# EAGLE board PCB2D-SmartWatch (EAGLE 9.7.0)
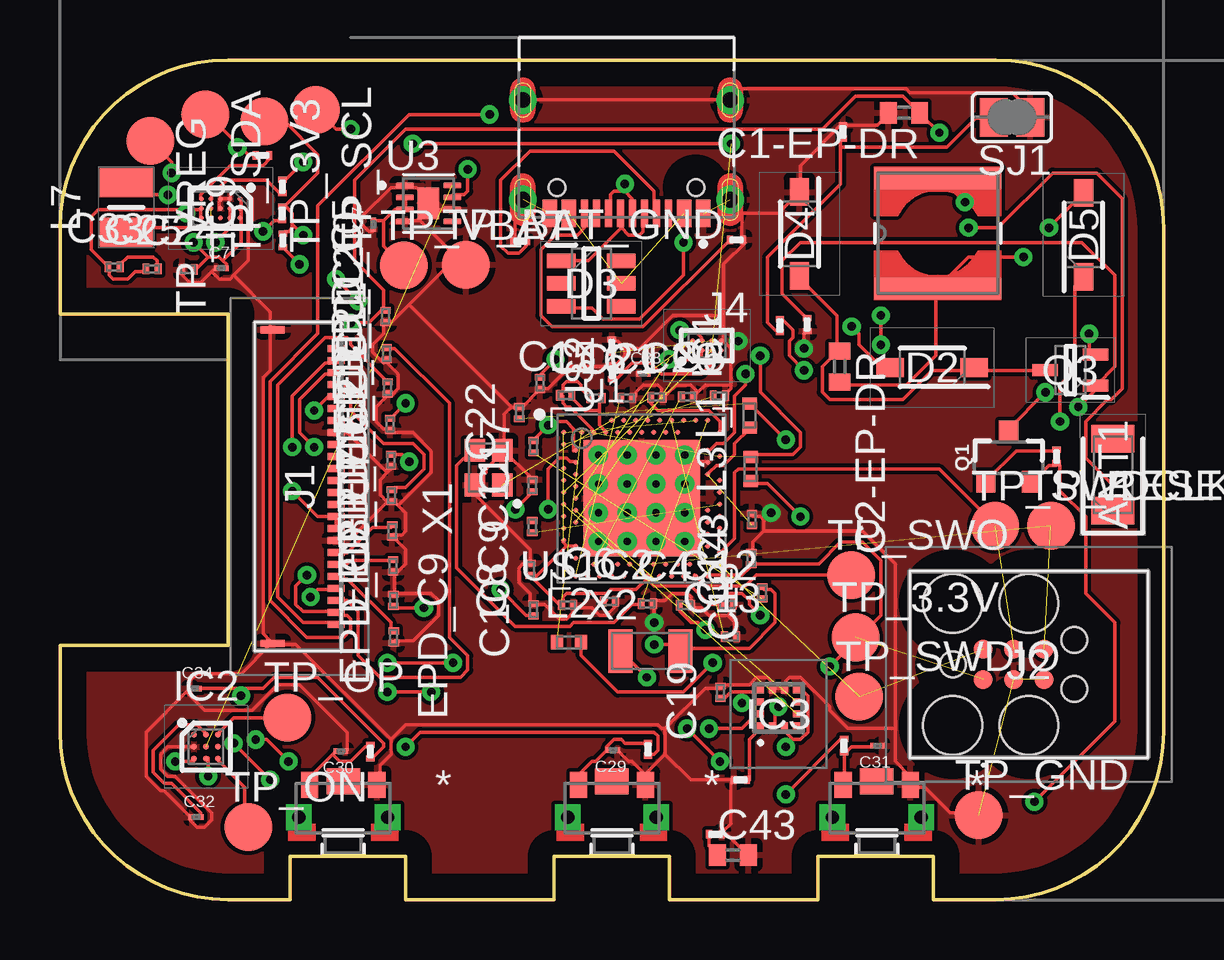
[diagram p0: board, top side]
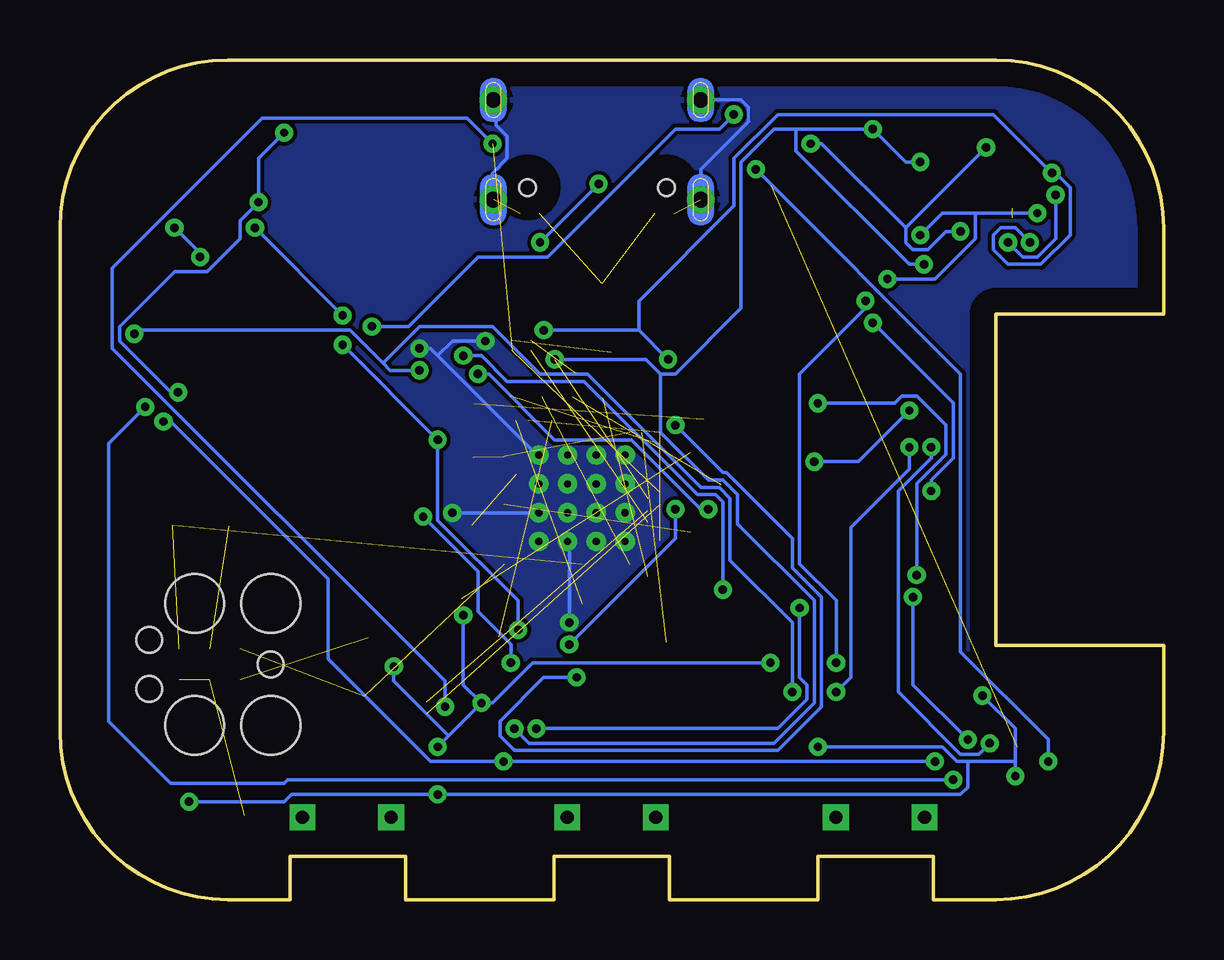
[diagram p1: board, bottom side, seen from below]

Size 46 x 35 mm. Coordinates in mm from the lower left corner, seen from the top.
Outline: 39,0 36.4,0 36.4,1.8 31.6,1.8 31.6,0 25.4,0 25.4,1.8 20.6,1.8 20.6,0 14.4,0 14.4,1.8 9.6,1.8 9.6,0 7,0 arc-90 0,7 0,10.6 7,10.6 7,24.4 0,24.4 0,28 arc-90 7,35 39,35 arc-90 46,28 46,7 arc-90 39,0
Copper layers (1*16): Top 0.035mm / dielectric 1.5mm / Bottom 0.035mm
Design rules "Fusion Electronics Design Rules": minimum track width 6mil, minimum drill 0.35mm, track to track 6mil, track to pad 6mil, pad to pad 6mil, via to via 6mil, smd to smd 6mil, copper to edge 40mil, drill to drill 6mil, minimum pad ring 10mil, minimum via ring 8mil, stop-mask expansion 4mil, vias tented up to drill 9999mil, thermal gap 10mil

## Footprints (pad centres in the part's own frame; a part is rotated, then mirrored left to right if it is on the bottom)
2450AT18B100E_ANTC3216X140N = smd 1.15 x 1.8: 1 -1.5,0; 2 1.5,0
NORDIC_NRF_3_RESC0201_L = smd 0.28 x 0.43: 1 -0.255,0; 2 0.255,0
ESP32_C6_LIBRARY_1_ESP32_WROVER_EAGLE-LTSPICE_C0402 = smd 0.7 x 0.9: 1 -0.65,0; 2 0.65,0
GRM011R60J152KE01L_2_CAPC0201X13N = smd 0.22 x 0.23: 1 -0.185,0; 2 0.185,0
GRM011R60J152KE01L_1_0201 = smd 0.35 x 0.25: 1 0,0.275; 2 0,-0.275
ESP32_C6_LIBRARY_5_SOD3716X135N = smd 1.15 x 0.8: 1 -1.75,0; 2 1.75,0
ESP32_C6_LIBRARY_3_SOT95P280X145-6N = smd 1.2 x 0.6: 1 -1.25,0.95; 2 -1.25,0; 3 -1.25,-0.95; 4 1.25,-0.95; 5 1.25,0; 6 1.25,0.95
BQ25180YBGR_BGA8C40P2X4_100X155X50 = smd 0.2 x 0.2: A1 -0.2,0.6; A2 0.2,0.6; B1 -0.2,0.2; B2 0.2,0.2; C1 -0.2,-0.2; C2 0.2,-0.2; D1 -0.2,-0.6; D2 0.2,-0.6
DRV2605YZFR_BGA9C50P3X3_144X144X62 = smd 0.25 x 0.25: A1 -0.5,0.5; A2 0,0.5; A3 0.5,0.5; B1 -0.5,0; B2 0,0; B3 0.5,0; C1 -0.5,-0.5; C2 0,-0.5; C3 0.5,-0.5
BMA423_BMA423 = smd 0.3 x 0.35: 1 -0.75,-0.775; 2 -0.25,-0.775; 3 0.25,-0.775; 4 0.75,-0.775; 7 0.75,0.775; 8 0.25,0.775; 9 -0.25,0.775; 10 -0.75,0.775 | smd 0.35 x 0.3: 5 0.775,-0.25; 6 0.775,0.25; 11 -0.775,0.25; 12 -0.775,-0.25
RT6160AWSC_BGA15C40P3X5_140X230X60 = smd 0.216 x 0.216: A1 -0.4,0.8; A2 0,0.8; A3 0.4,0.8; B1 -0.4,0.4; B2 0,0.4; B3 0.4,0.4; C1 -0.4,0; C2 0,0; C3 0.4,0; D1 -0.4,-0.4; D2 0,-0.4; D3 0.4,-0.4; E1 -0.4,-0.8; E2 0,-0.8; E3 0.4,-0.8
503480-2400_5034802400 = smd 0.3 x 0.7: 1 -5.75,1.525; 2 -5.25,1.525; 3 -4.75,1.525; 4 -4.25,1.525; 5 -3.75,1.525; 6 -3.25,1.525; 7 -2.75,1.525; 8 -2.25,1.525; 9 -1.75,1.525; 10 -1.25,1.525; 11 -0.75,1.525; 12 -0.25,1.525; 13 0.25,1.525; 14 0.75,1.525; 15 1.25,1.525; 16 1.75,1.525; 17 2.25,1.525; 18 2.75,1.525; 19 3.25,1.525; 20 3.75,1.525; 21 4.25,1.525; 22 4.75,1.525; 23 5.25,1.525; 24 5.75,1.525 | smd 0.3 x 1: MP1 -6.54,-1.125; MP2 6.54,-1.125
TC2030-IDC_TC2030IDC = smd 0.783 x 0.783: 1 -0.953,-0.635; 2 -0.953,0.635; 3 0.317,-0.635; 4 0.317,0.635; 5 1.588,-0.635; 6 1.588,0.635 | hole 2.451: -2.223,-2.54; -2.223,2.54; 0.952,-2.54; 0.952,2.54 | hole 1.067: -2.223,0; 2.857,-1.016; 2.857,1.016
KH-TYPE-C-16P_KINGHELM_KH-TYPE-C-16P = smd 0.6 x 1.15: A1_B12 -3.2,4.725; A4_B9 -2.4,4.725; A9_B4 2.4,4.725; A12_B1 3.2,4.725 | smd 0.3 x 1.15: A5 -1.25,4.725; A6 -0.25,4.725; A7 0.25,4.725; A8 1.25,4.725; B5 1.75,4.725; B6 0.75,4.725; B7 -0.75,4.725; B8 -1.75,4.725 | drill 0.65 pad 1.05: SH1 -4.32,0; SH2 4.32,0; SH3 -4.32,4.15; SH4 4.32,4.15 | hole 0.7: -2.89,3.65; 2.89,3.65
NORDIC_NRF_2_RESC0402_L = smd 0.5 x 0.6: 1 -0.5,0; 2 0.5,0
ESP32_C6_LIBRARY_2_IND_4828-WE-TPC_WRE = smd 0.9 x 5.3: 1 -2.286,0; 2 2.286,0
MLP2016SR47MT0S1_INDC2016X100N = smd 1.2 x 2.2: 1 -1.028,0; 2 1.028,0
ESP32_C6_LIBRARY_4_ESP32_C6_LIBRARY_4_ESP32_C6_LIBRARY_4_ESP32_C6_LIBRARY_4_ESP32_WROVER_SPARKFUN-DISCRETESEMI_SOT23-3 = smd 0.8 x 0.9: 1 -0.95,-1; 2 0.95,-1; 3 0,1.1
ESP32_C6_LIBRARY_6_SOT65P210X110-3N = smd 1.05 x 0.5: 1 -1.05,0.65; 2 -1.05,-0.65; 3 1.05,0
ERA-1AEB3401C_0201 = smd 0.35 x 0.25: 1 0,0.275; 2 0,-0.275
CPF0201D7K68C1_0201 = smd 0.35 x 0.25: 1 0,0.275; 2 0,-0.275
ESP32_C6_LIBRARY_7_JUMPER_SJ = smd 1.168 x 1.6: 1 -0.762,0; 2 0.762,0
2025-10-22_07-23-44_LIBRARY_SW_EVP-AKE31A_PAN = smd 0.711 x 1.092: 1 -1.4,-0.972; 2 1.4,-0.972 | drill 0.559 pad 0.914 square: 3 -1.848,0.381; 4 1.848,0.381 | smd 1.397 x 1.092: 5 0,-1.124
HECTOR_WATCH_1_TP20R = smd 2 x 2: TP 0,0
NORDIC_NRF_4_AQFN50P700X700X85_HS-74N = smd 4.85 x 4.85: P$74 0,0 | drill 0.3 pad 0.6: P$75 -1.8,1.8; P$76 -0.6,1.8; P$77 0.6,1.8; P$78 1.8,1.8; P$79 -1.8,0.6; P$80 -0.6,0.6; P$81 0.6,0.6; P$82 1.8,0.6; P$83 -1.8,-0.6; P$84 -0.6,-0.6; P$85 0.6,-0.6; P$86 1.8,-0.6; P$87 -1.8,-1.8; P$88 -0.6,-1.8; P$89 0.6,-1.8; P$90 1.8,-1.8 | smd 0.2 x 0.2: P$A8 -1.25,3.25; P$A10 -0.75,3.25; P$A12 -0.25,3.25; P$A14 0.25,3.25; P$A16 0.75,3.25; P$A18 1.25,3.25; P$A20 1.75,3.25; P$A22 2.25,3.25; P$A23 2.75,3.25; P$AA24 3.25,-2.25; P$AB2 -2.75,-2.5; P$AC5 -2,-2.75; P$AC9 -1,-2.75; P$AC11 -0.5,-2.75; P$AC13 0,-2.75; P$AC15 0.5,-2.75; P$AC17 1,-2.75; P$AC19 1.5,-2.75; P$AC21 2,-2.75; P$AC24 3.25,-2.75; P$AD2 -2.75,-3.25; P$AD4 -2.25,-3.25; P$AD6 -1.75,-3.25; P$AD8 -1.25,-3.25; P$AD10 -0.75,-3.25; P$AD12 -0.25,-3.25; P$AD14 0.25,-3.25; P$AD16 0.75,-3.25; P$AD18 1.25,-3.25; P$AD20 1.75,-3.25; P$AD22 2.25,-3.25; P$AD23 2.75,-3.25; P$B1 -3.25,2.75; P$B3 -2.5,2.75; P$B5 -2,2.75; P$B7 -1.5,2.75; P$B9 -1,2.75; P$B11 -0.5,2.75; P$B13 0,2.75; P$B15 0.5,2.75; P$B17 1,2.75; P$B19 1.5,2.75; P$B24 3.25,2.75; P$C1 -3.25,2.25; P$D2 -2.75,2; P$D23 2.75,2; P$E24 3.25,1.75; P$F2 -2.75,1.5; P$F23 2.75,1.5; P$G1 -3.25,1.25; P$H2 -2.75,1; P$H23 2.75,1; P$J1 -3.25,0.75; P$J24 3.25,0.75; P$K2 -2.75,0.5; P$L1 -3.25,0.25; P$L24 3.25,0.25; P$M2 -2.75,0; P$N1 -3.25,-0.25; P$N24 3.25,-0.25; P$P2 -2.75,-0.5; P$P23 2.75,-0.5; P$R1 -3.25,-0.75; P$R24 3.25,-0.75; P$T2 -2.75,-1; P$T23 2.75,-1; P$U1 -3.25,-1.25; P$U24 3.25,-1.25; P$V23 2.75,-1.5; P$W1 -3.25,-1.75; P$W24 3.25,-1.75; P$Y2 -2.75,-2; P$Y23 2.75,-2
ESP32_C6_LIBRARY_SON50P200X200X80-9N = smd 0.76 x 0.27: 1 -0.985,0.75; 2 -0.985,0.25; 3 -0.985,-0.25; 4 -0.985,-0.75; 5 0.985,-0.75; 6 0.985,-0.25; 7 0.985,0.25; 8 0.985,0.75 | smd 0.9 x 1.3: 9 0,0
NORDIC_NRF_BT-XTAL_2016_N = smd 0.95 x 0.85: 1 -0.725,-0.575; 2 0.725,-0.575; 3 0.725,0.575; 4 -0.725,0.575
NORDIC_NRF_1_XTAL_3215_N = smd 1 x 1.8: 1 -1.25,0; 2 1.25,0

## Placement (x,y rotation side)
ANT1  2450AT18B100E  [2450AT18B100E_ANTC3216X140N]  43.89,17.71 90 top
C1  12pF  [NORDIC_NRF_3_RESC0201_L]  24.88,20.94 0 top
C1-EP-DR  10uF  [ESP32_C6_LIBRARY_1_ESP32_WROVER_EAGLE-LTSPICE_C0402]  35.19,32.8 180 top
C2  12pF  [NORDIC_NRF_3_RESC0201_L]  24.48,12.33 0 top
C2-EP-DR  4.7uF/25V  [ESP32_C6_LIBRARY_1_ESP32_WROVER_EAGLE-LTSPICE_C0402]  32.5,22.22 270 top
C3  1pF  [NORDIC_NRF_3_RESC0201_L]  28.84,15.85 90 top
C4  1pF  [NORDIC_NRF_3_RESC0201_L]  26.07,12.27 0 top
C5  100nF  [NORDIC_NRF_3_RESC0201_L]  27.49,20.99 0 top
C6  4.7uF  [NORDIC_NRF_3_RESC0201_L]  22.9,12.43 0 top
C7  0.1uF  [GRM011R60J152KE01L_2_CAPC0201X13N]  6.73,26.32 0 top
C8  100nF  [NORDIC_NRF_3_RESC0201_L]  19.61,13.77 90 top
C9  820pF  [NORDIC_NRF_3_RESC0201_L]  19.69,15.55 90 top
C10  N.C.  [NORDIC_NRF_3_RESC0201_L]  19.74,12.08 90 top
C11  100pF  [NORDIC_NRF_3_RESC0201_L]  19.69,17.25 90 top
C12  100nF  [NORDIC_NRF_3_RESC0201_L]  27.81,12.3 0 top
C13  N.C.  [NORDIC_NRF_3_RESC0201_L]  27.95,10.95 0 top
C14  4.7uF  [NORDIC_NRF_3_RESC0201_L]  28.81,14.21 90 top
C15  1.0uF  [NORDIC_NRF_3_RESC0201_L]  21.08,21.02 0 top
C16  47nF  [NORDIC_NRF_3_RESC0201_L]  22.34,20.91 0 top
C17  12pF  [NORDIC_NRF_3_RESC0201_L]  19.74,18.88 90 top
C18  12pF  [NORDIC_NRF_3_RESC0201_L]  29.27,12.79 90 top
C19  100nF  [NORDIC_NRF_3_RESC0201_L]  27.53,8.64 90 top
C20  4.7uF  [NORDIC_NRF_3_RESC0201_L]  26.16,20.96 0 top
C21  4.7uF  [NORDIC_NRF_3_RESC0201_L]  23.62,20.9 0 top
C22  N.C.  [NORDIC_NRF_3_RESC0201_L]  19.15,20.29 90 top
C24  10uF  [NORDIC_NRF_3_RESC0201_L]  5.34,26.27 0 top
C25  22uF  [NORDIC_NRF_3_RESC0201_L]  3.84,26.29 0 top
C27  0.1uF  [GRM011R60J152KE01L_2_CAPC0201X13N]  13.06,28.14 90 top
C29  1uF  [GRM011R60J152KE01L_2_CAPC0201X13N]  23.05,6.23 180 top
C30  1uF  [GRM011R60J152KE01L_2_CAPC0201X13N]  11.71,6.19 180 top
C31  1uF  [GRM011R60J152KE01L_2_CAPC0201X13N]  34.07,6.42 180 top
C32  0.1uF  [GRM011R60J152KE01L_2_CAPC0201X13N]  5.69,3.44 0 top
C33  22uF  [NORDIC_NRF_3_RESC0201_L]  2.26,26.37 0 top
C34  0.1uF  [GRM011R60J152KE01L_2_CAPC0201X13N]  5.61,8.8 0 top
C37  1uF  [GRM011R60J152KE01L_1_0201]  23.01,23.07 0 top
C38  1uF  [GRM011R60J152KE01L_2_CAPC0201X13N]  24.31,21.92 0 top
C42  0.1uF  [GRM011R60J152KE01L_1_0201]  27.33,2.72 90 top
C43  4.7uF  [ESP32_C6_LIBRARY_1_ESP32_WROVER_EAGLE-LTSPICE_C0402]  28.05,1.86 0 top
D2  MBR0530  [ESP32_C6_LIBRARY_5_SOD3716X135N]  36.36,22.18 180 top
D3  USBLC6-2SC6Y  [ESP32_C6_LIBRARY_3_SOT95P280X145-6N]  22.15,25.68 0 top
D4  MBR0530  [ESP32_C6_LIBRARY_5_SOD3716X135N]  30.82,27.75 270 top
D5  MBR0530  [ESP32_C6_LIBRARY_5_SOD3716X135N]  42.66,27.7 90 top
EPD_C1  1uF/50V  [NORDIC_NRF_3_RESC0201_L]  13.8,18.31 90 top
EPD_C2  1uF/50V  [NORDIC_NRF_3_RESC0201_L]  13.83,16.83 90 top
EPD_C5  0.1uF/50V  [NORDIC_NRF_3_RESC0201_L]  13.57,24.31 90 top
EPD_C6  1uF/50V  [NORDIC_NRF_3_RESC0201_L]  13.85,15.37 90 top
EPD_C7  1uF/50V  [NORDIC_NRF_3_RESC0201_L]  13.89,13.91 90 top
EPD_C8  1uF/50V  [NORDIC_NRF_3_RESC0201_L]  13.91,10.94 90 top
EPD_C9  1uF/50V  [NORDIC_NRF_3_RESC0201_L]  13.9,12.48 270 top
EPD_C10  1uF/50V  [NORDIC_NRF_3_RESC0201_L]  13.62,22.75 90 top
EPD_C11  1uF/50V  [NORDIC_NRF_3_RESC0201_L]  13.76,19.8 90 top
EPD_C12  1uF/50V  [NORDIC_NRF_3_RESC0201_L]  13.65,21.33 90 top
IC1  BQ25180YBGR  [BQ25180YBGR_BGA8C40P2X4_100X155X50]  26.97,23.09 90 top
IC2  DRV2605YZFR  [DRV2605YZFR_BGA9C50P3X3_144X144X62]  6.09,6.37 0 top
IC3  BMA421  [BMA423_BMA423]  29.95,7.99 0 top
IC9  RT6160AWSC  [RT6160AWSC_BGA15C40P3X5_140X230X60]  6.69,28.82 270 top
J1  503480-2400  [503480-2400_5034802400]  9.99,17.21 270 top
J2  TC2030-IDC  [TC2030-IDC_TC2030IDC]  39.43,9.8 0 top
J4  KH-TYPE-C-16P  [KH-TYPE-C-16P_KINGHELM_KH-TYPE-C-16P]  23.61,33.33 180 top
L1  3.9nH  [NORDIC_NRF_2_RESC0402_L]  28.75,20.18 90 top
L2  100uH  [NORDIC_NRF_2_RESC0402_L]  21.21,10.73 0 top
L3  15nH  [NORDIC_NRF_2_RESC0402_L]  28.79,17.95 90 top
L5  68uH  [ESP32_C6_LIBRARY_2_IND_4828-WE-TPC_WRE]  36.59,27.77 90 top
L7  FTC252012SR47MBCA  [MLP2016SR47MT0S1_INDC2016X100N]  2.76,28.85 270 top
Q1  20V/4.2A/52mΩ/1.4W  [ESP32_C6_LIBRARY_4_ESP32_C6_LIBRARY_4_ESP32_C6_LIBRARY_4_ESP32_C6_LIBRARY_4_ESP32_WROVER_SPARKFUN-DISCRETESEMI_SOT23-3]  39.54,18.42 0 top
Q3  SI1308EDL-T1-GE3  [ESP32_C6_LIBRARY_6_SOT65P210X110-3N]  42.11,22.07 180 top
R1_EP_DR  0.47  [ERA-1AEB3401C_0201]  30.01,23.92 180 top
R1_USB  5K1  [ERA-1AEB3401C_0201]  19.19,27.45 90 top
R2  0  [CPF0201D7K68C1_0201]  8.44,31.01 90 top
R2_EP_DR  10K  [ERA-1AEB3401C_0201]  31.15,23.97 180 top
R2_USB  5K1  [ERA-1AEB3401C_0201]  28.2,27.51 90 top
R3  0  [ERA-1AEB3401C_0201]  28.37,4.99 90 top
R4  0  [CPF0201D7K68C1_0201]  9.27,29.73 0 top
R5  10k  [ERA-1AEB3401C_0201]  12.94,6.17 0 top
R7  10k  [ERA-1AEB3401C_0201]  24.51,6.26 0 top
R8  10k  [ERA-1AEB3401C_0201]  32.68,6.41 180 top
R9  10K  [ERA-1AEB3401C_0201]  23.03,21.98 0 top
R17  3K3  [CPF0201D7K68C1_0201]  9.29,27.48 0 top
R18  3K3  [CPF0201D7K68C1_0201]  9.26,28.6 0 top
R_PWR_EPD  10K  [ERA-1AEB3401C_0201]  41.54,18.48 0 top
R_TYPE_SEL  2.2  [ERA-1AEB3401C_0201]  32.64,32 0 top
SJ1  [ESP32_C6_LIBRARY_7_JUMPER_SJ]  39.68,32.61 180 top
SW_DN  2025-10-22_07-23-44_LIBRARY_EVP-AKE31ASW_EVP-AKE31A_PAN  [2025-10-22_07-23-44_LIBRARY_SW_EVP-AKE31A_PAN]  23.01,3.81 180 top
SW_ENT  2025-10-22_07-23-44_LIBRARY_EVP-AKE31ASW_EVP-AKE31A_PAN  [2025-10-22_07-23-44_LIBRARY_SW_EVP-AKE31A_PAN]  34.05,3.81 180 top
SW_UP  2025-10-22_07-23-44_LIBRARY_EVP-AKE31ASW_EVP-AKE31A_PAN  [2025-10-22_07-23-44_LIBRARY_SW_EVP-AKE31A_PAN]  11.81,3.81 180 top
TP_3.3V  HECTOR_WATCH_1_TPTP20R  [HECTOR_WATCH_1_TP20R]  33.16,10.93 0 top
TP_3V3  HECTOR_WATCH_1_TPTP20R  [HECTOR_WATCH_1_TP20R]  8.52,32.44 270 top
TP_BAT_GND  HECTOR_WATCH_1_TPTP20R  [HECTOR_WATCH_1_TP20R]  16.92,26.47 0 top
TP_GND  HECTOR_WATCH_1_TPTP20R  [HECTOR_WATCH_1_TP20R]  38.3,3.51 0 top
TP_ON  HECTOR_WATCH_1_TPTP20R  [HECTOR_WATCH_1_TP20R]  7.85,3.02 0 top
TP_OP  HECTOR_WATCH_1_TPTP20R  [HECTOR_WATCH_1_TP20R]  9.49,7.59 0 top
TP_RESET  HECTOR_WATCH_1_TPTP20R  [HECTOR_WATCH_1_TP20R]  41.31,15.59 0 top
TP_SCL  HECTOR_WATCH_1_TPTP20R  [HECTOR_WATCH_1_TP20R]  10.67,32.91 270 top
TP_SDA  HECTOR_WATCH_1_TPTP20R  [HECTOR_WATCH_1_TP20R]  6.06,32.73 270 top
TP_SWDCLK  HECTOR_WATCH_1_TPTP20R  [HECTOR_WATCH_1_TP20R]  38.97,15.57 0 top
TP_SWDIO  HECTOR_WATCH_1_TPTP20R  [HECTOR_WATCH_1_TP20R]  33.32,8.46 0 top
TP_SWO  HECTOR_WATCH_1_TPTP20R  [HECTOR_WATCH_1_TP20R]  32.97,13.52 0 top
TP_VBAT  HECTOR_WATCH_1_TPTP20R  [HECTOR_WATCH_1_TP20R]  14.34,26.43 0 top
TP_VREG  HECTOR_WATCH_1_TPTP20R  [HECTOR_WATCH_1_TP20R]  3.77,31.63 270 top
U1  NRF52840_QF  [NORDIC_NRF_4_AQFN50P700X700X85_HS-74N]  24.24,16.73 0 top
U3  MAX17048G+T10  [ESP32_C6_LIBRARY_SON50P200X200X80-9N]  15.36,29.02 0 top
U$1  [NORDIC_NRF_3_RESC0201_L]  21.16,12.28 0 top
U$2  [NORDIC_NRF_3_RESC0201_L]  20.01,21.52 270 top
X1  32Mz  [NORDIC_NRF_BT-XTAL_2016_N]  17.86,18 90 top
X2  32.768KHz  [NORDIC_NRF_1_XTAL_3215_N]  24.62,10.36 0 top

## Library data of the parts
ANT1 = InkTime_v5; ARROW_PART_NUMBER: 2450AT18B100E; ARROW_PRICE-STOCK: https://www.arrow.com/en/products/2450at18b100e/johanson-dielectrics?utm_currency=USD&region=nac; DESCRIPTION: Antennas 2.45GHz ANTENNA; HEIGHT: 1.4mm; MANUFACTURER_NAME: JOHANSON TECHNOLOGY; MANUFACTURER_PART_NUMBER: 2450AT18B100E; MOUSER_PART_NUMBER: 609-2450AT18B100E; MOUSER_PRICE-STOCK: https://www.mouser.co.uk/ProductDetail/Johanson-Technology/2450AT18B100E?qs=yCnrNFeXz%252Bh5MFsFIXGZGA%3D%3D
C1-C6 C8-C19 C21 C22 C24 C25 C33 C37 C42 EPD_C1 EPD_C2 EPD_C5-EPD_C12 L1-L3 R1_EP_DR R1_USB R2 R2_EP_DR R2_USB R3-R5 R7-R9 R17 R18 R_PWR_EPD R_TYPE_SEL SJ1 TP_3.3V TP_3V3 TP_BAT_GND TP_GND TP_ON TP_OP TP_RESET TP_SCL TP_SDA TP_SWDCLK TP_SWDIO TP_SWO TP_VBAT TP_VREG U1 U$1 U$2 X1 X2 = InkTime_v5
C1-EP-DR C2-EP-DR C43 = InkTime_v5; SPICEMODEL: NONE; SPICEPREFIX: C
C7 C27 C29-C32 C34 C38 = InkTime_v5; AVAILABILITY: In Stock; CHECK_PRICES: https://www.snapeda.com/parts/GRM011R60J152KE01L/Murata/view-part/?ref=eda; DESCRIPTION: SMD Capacitor X5R(EIA) with Capacitance: 1500pF Tol. 10%. Rated Voltage: 6.3Vdc; MF: Murata; MP: GRM011R60J152KE01L; PACKAGE: 0201 Murata; PRICE: None; SNAPEDA_LINK: https://www.snapeda.com/parts/GRM011R60J152KE01L/Murata/view-part/?ref=snap
C20 = InkTime_v5; SPICEPREFIX: C
D2 D4 D5 = InkTime_v5; AVAILABILITY: In Stock; CHECK_PRICES: https://www.snapeda.com/parts/MBR0530/Onsemi/view-part/?ref=eda; DESCRIPTION: Diode Schottky 30 V 500mA Surface Mount SOD-123; MF: ON Semiconductor; MP: MBR0530; PACKAGE: SOD-123-2 ON Semiconductor; PRICE: None; PURCHASE-URL: https://www.snapeda.com/api/url_track_click_mouser/?unipart_id=179458&manufacturer=ON Semiconductor&part_name=MBR0530&search_term=None; SNAPEDA_LINK: https://www.snapeda.com/parts/MBR0530/Onsemi/view-part/?ref=snap
D3 = InkTime_v5; AVAILABILITY: In Stock; CHECK_PRICES: https://www.snapeda.com/parts/USBLC6-2SC6Y/STMicroelectronics/view-part/?ref=eda; DESCRIPTION: 17V Clamp 5A (8/20µs) Ipp Tvs Diode Surface Mount SOT-23-6; MF: STMicroelectronics; MP: USBLC6-2SC6Y; PACKAGE: SOT-23-6 STMicroelectronics; PRICE: None; SNAPEDA_LINK: https://www.snapeda.com/parts/USBLC6-2SC6Y/STMicroelectronics/view-part/?ref=snap
IC1 = InkTime_v5; ARROW_PART_NUMBER: BQ25180YBGR; ARROW_PRICE-STOCK: https://www.arrow.com/en/products/bq25180ybgr/texas-instruments?utm_currency=USD&region=nac; DESCRIPTION: Charger IC Lithium Ion/Polymer, Lithium Iron Phosphate 8-DSBGA (1.6x1.1); HEIGHT: 0.5mm; MANUFACTURER_NAME: Texas Instruments; MANUFACTURER_PART_NUMBER: BQ25180YBGR; MOUSER_PART_NUMBER: 595-BQ25180YBGR; MOUSER_PRICE-STOCK: https://www.mouser.co.uk/ProductDetail/Texas-Instruments/BQ25180YBGR?qs=doiCPypUmgEWjAK%252BJAX6Tw%3D%3D
IC2 = InkTime_v5; ARROW_PART_NUMBER: DRV2605YZFR; ARROW_PRICE-STOCK: https://www.arrow.com/en/products/drv2605yzfr/texas-instruments?region=nac; DESCRIPTION: Haptic Driver for ERM/LRA with Built-In Library and Smart Loop Architecture; HEIGHT: 0.625mm; MANUFACTURER_NAME: Texas Instruments; MANUFACTURER_PART_NUMBER: DRV2605YZFR
IC3 = InkTime_v5; ARROW_PART_NUMBER: BMA423; ARROW_PRICE-STOCK: https://www.arrow.com/en/products/bma423/bosch; DESCRIPTION: Accelerometers Triaxial low-g 12bit Acceleration Sensor; HEIGHT: 1mm; MANUFACTURER_NAME: BOSCH; MANUFACTURER_PART_NUMBER: BMA423; MOUSER_PART_NUMBER: 262-BMA423; MOUSER_PRICE-STOCK: https://www.mouser.co.uk/ProductDetail/Bosch-Sensortec/BMA423?qs=HXFqYaX1Q2xC%252BSgeGoX3mg%3D%3D
IC9 = InkTime_v5; DESCRIPTION: Buck-Boost Regulator Positive Output Step-Up/Step-Down I2C DC-DC Controller IC 15-WL-CSP (BSC) (1.4x2.3); HEIGHT: 0.6mm; MANUFACTURER_NAME: RICHTEK; MANUFACTURER_PART_NUMBER: RT6160AWSC; MOUSER_PART_NUMBER: 835-RT6160AWSC; MOUSER_PRICE-STOCK: https://www.mouser.co.uk/ProductDetail/Richtek/RT6160AWSC?qs=amGC7iS6iy%2FLd9PSoixZXQ%3D%3D
J1 = InkTime_v5; DESCRIPTION: FFC & FPC Connectors 0.5mm FPC RA SMT Dual Contact 24Ckt; HEIGHT: 1.87mm; MANUFACTURER_NAME: Molex; MANUFACTURER_PART_NUMBER: 503480-2400; MOUSER_PART_NUMBER: 538-503480-2400; MOUSER_PRICE-STOCK: https://www.mouser.co.uk/ProductDetail/Molex/503480-2400?qs=OAhjpuo3Vu7efIoxFh9AOw%3D%3D
J2 = InkTime_v5; DESCRIPTION: CABLE ADAPTER 6 POS; HEIGHT: 19mm; MANUFACTURER_NAME: Tag Connect; MANUFACTURER_PART_NUMBER: TC2030-IDC
J4 = InkTime_v5; AVAILABILITY: Not in stock; CHECK_PRICES: https://www.snapeda.com/parts/KH-TYPE-C-16P/Kinghelm/view-part/?ref=eda; MF: kinghelm; MP: KH-TYPE-C-16P; PACKAGE: None; PRICE: None; SNAPEDA_LINK: https://www.snapeda.com/parts/KH-TYPE-C-16P/Kinghelm/view-part/?ref=snap
L5 = InkTime_v5; COPYRIGHT: Copyright (C) 2024 Ultra Librarian. All rights reserved.; MANUFACTURER_PART_NUMBER: 744043680; MFR_NAME: Wurth Electronics
L7 = InkTime_v5; DESCRIPTION: SMD / SMT Inductors (Coils), L=0.47?H, L x W x T :; HEIGHT: 1mm; JLCPCB: https://jlcpcb.com/partdetail/6763488-FTC252012SR47MBCA/C5832368; MANUFACTURER_NAME: TDK; MANUFACTURER_PART_NUMBER: FTC252012SR47MBCA
Q1 = InkTime_v5; PROD_ID: TRAN-14388
Q3 = InkTime_v5; AVAILABILITY: In Stock; CHECK_PRICES: https://www.snapeda.com/parts/SI1308EDL-T1-GE3/Vishay+Siliconix/view-part/?ref=eda; DESCRIPTION: Si1308EDL-T1-GE3 N-channel MOSFET Transistor, 1.5 A, 30 V, 3-Pin SC-70 | Siliconix / Vishay SI1308EDL-T1-GE3; MF: Vishay Siliconix; MP: SI1308EDL-T1-GE3; PACKAGE: SOT-323 Vishay Semiconductor; PRICE: None; PURCHASE-URL: https://www.snapeda.com/api/url_track_click_mouser/?unipart_id=274603&manufacturer=Vishay Siliconix&part_name=SI1308EDL-T1-GE3&search_term=None; SNAPEDA_LINK: https://www.snapeda.com/parts/SI1308EDL-T1-GE3/Vishay+Siliconix/view-part/?ref=snap
SW_DN SW_ENT SW_UP = InkTime_v5; COPYRIGHT: Copyright (C) 2025 Ultra Librarian. All rights reserved.; DIGI-KEY_PART_NUMBER_1: P123437TR-ND; DIGI-KEY_PART_NUMBER_2: P123437CT-ND; DIGI-KEY_PART_NUMBER_3: P123437DKR-ND; MANUFACTURER_NAME: Panasonic; MANUFACTURER_PART_NUMBER: EVP-AKE31A
U3 = InkTime_v5; AVAILABILITY: In Stock; CHECK_PRICES: https://www.snapeda.com/parts/MAX17048G+T10/Analog+Devices/view-part/?ref=eda; DESCRIPTION: 3µA 1-Cell/2-Cell Fuel Gauge with ModelGauge; MF: Analog Devices; MP: MAX17048G+T10; PACKAGE: TDFN-8 Maxim; PRICE: None; PURCHASE-URL: https://www.snapeda.com/api/url_track_click_mouser/?unipart_id=329239&manufacturer=Analog Devices&part_name=MAX17048G+T10&search_term=None; SNAPEDA_LINK: https://www.snapeda.com/parts/MAX17048G+T10/Analog+Devices/view-part/?ref=snap

## Nets
3V3/1.7D: C34.2 IC2.C2 Q1.2 R5.2 R7.2 R8.2 R_PWR_EPD.2
3V3/2.4A: C6.1 C8.1 C12.1 C14.1 C19.1 C25.1 C33.1 IC3.3 IC3.7 IC3.10 IC9.E2 IC9.E3 J2.1 R17.1 R18.1 TP_3.3V.TP TP_3V3.TP U1.P$A22 U1.P$AD14 U1.P$AD23 U1.P$B1 U1.P$W1 U1.P$Y2 U$1.1
ALERT/1.6C: U3.5
ALERT/2.5C: U1.P$J24
D+/1.5D: D3.4
D+/2.7D: U1.P$AD6
D-/1.5D: D3.6
D-/2.7D: U1.P$AD4
DEC1: C5.1 U1.P$C1
DEC3: C11.1 U1.P$D23
DEC4_6: C10.1 C15.1 C16.1 L3.2 U1.P$B5 U1.P$E24
DN: D3.1 J4.A7 J4.B7
DP: D3.3 J4.A6 J4.B6
EPD_3V3: C1-EP-DR.1 EPD_C5.2 J1.15 J1.16 L5.2 Q1.3
EPD_BUSY/1.5D: J1.9
EPD_BUSY/2.2D: U1.P$AD12
EPD_CS/1.4C: J1.12
EPD_CS/2.2D: U1.P$K2
EPD_DC/1.5D: J1.11
EPD_DC/2.2D: U1.P$AD10
EPD_RST/1.5D: J1.10
EPD_RST/2.2D: U1.P$AC11
GDR: J1.2 Q3.1 R2_EP_DR.2
GND: C1-EP-DR.2 C1.2 C2.2 C3.2 C4.2 C5.2 C6.2 C7.1 C8.2 C10.2 C11.2 C12.2 C13.2 C14.2 C19.2 C20.2 C21.2 C22.2 C24.1 C27.1 C29.1 C30.1 C31.1 C32.1 C34.1 C37.1 C38.1 C42.2 C43.2 D4.1 EPD_C1.1 EPD_C2.1 EPD_C5.1 EPD_C6.1 EPD_C7.1 EPD_C8.1 EPD_C9.1 EPD_C10.1 EPD_C11.1 EPD_C12.1 IC1.D2 IC2.B1 IC3.8 IC3.9 IC9.B1 IC9.C1 IC9.C2 J1.8 J1.17 J1.MP1 J1.MP2 J2.3 J2.5 J4.A1_B12 J4.A12_B1 J4.SH1 J4.SH2 J4.SH3 J4.SH4 R1_USB.1 R2_EP_DR.1 R2_USB.2 R3.1 R9.1 R_TYPE_SEL.1 SJ1.1 SW_DN.1 SW_ENT.1 SW_UP.1 TP_BAT_GND.TP TP_GND.TP U1.P$74 U1.P$75 U1.P$76 U1.P$77 U1.P$78 U1.P$79 U1.P$80 U1.P$81 U1.P$82 U1.P$83 U1.P$84 U1.P$85 U1.P$86 U1.P$87 U1.P$88 U1.P$89 U1.P$90 U1.P$F23 U3.1 U3.4 U3.6 U3.9 U$1.2 U$2.2 X1.2 X1.4
HAPTIC_EN/1.4C: IC2.A1
HAPTIC_EN/2.6A: U1.P$U1
IMU_INT1: IC3.5 U1.P$N1
IMU_INT2: IC3.6 U1.P$P2
LX1: IC9.B2 IC9.B3 L7.1
LX2: IC9.D2 IC9.D3 L7.2
MOSI/1.5B: J1.14
MOSI/2.2D: U1.P$B13
N$1: L2.2 L3.1
N$2: L2.1 U1.P$B3
N$3: IC1.D1 R9.2
N$4: C15.2 C16.2 U1.P$B7
N$5: C20.1 U1.P$AC5
N$6: C21.1 U1.P$AD2
N$7: C17.1 C18.1
N$8: C3.1 L1.1 U1.P$H23
N$9: C1.1 U1.P$B24 X1.1
N$10: C13.1 U1.P$A18
N$11: C9.1 U1.P$N24
N$12: C2.1 U1.P$A23 X1.3
N$13: IC3.1 R3.2
N$14: IC9.C3
N$15: EPD_C2.2 J1.4
N$16: IC9.D1 R4.2
N$17: C25.2 C33.2
N$18: EPD_C1.2 J1.5
N$19: IC9.E1 R2.2
N$20: EPD_C12.2 J1.24
N$21: R1_EP_DR.1 R_TYPE_SEL.2 SJ1.2
N$22: C2-EP-DR.2 D5.2 L5.1
N$23: EPD_C10.2 J1.22
N$24: C2-EP-DR.1 D2.1 D4.2 Q3.3
N$25: EPD_C7.2 J1.19
N$26: EPD_C8.2 J1.20
N$27: EPD_C6.2 J1.18
N$28: IC2.B3
N$29: C32.2 IC2.A2
N$31: C42.1 C43.1
N$34: D3.2
N$35: J4.B5 R2_USB.1
N$40: J4.A5 R1_USB.2
N.C.: C9.2
OUT+: IC2.A3 TP_OP.TP
OUT-: IC2.C3 TP_ON.TP
P0.00/XL1: C17.2 U1.P$D2 X2.1
P0.01/XL2: C18.2 U1.P$F2 X2.2
P0.04: U1.P$J1
P0.09: U1.P$L24
P0.13/1.5D: C30.2 R5.1 SW_UP.2
P0.13/2.6C: U1.P$AD8
P0.14/1.5D: C31.2 R8.1 SW_ENT.2
P0.14/2.7C: U1.P$AC9
P0.19: U1.P$AC15
P0.20: U1.P$AD16
P0.21: U1.P$AC17
P0.22: U1.P$AD18
P0.23: U1.P$AC19
P0.24: U1.P$AD20
P0.25: U1.P$AC21
P0.26: U1.P$G1
P0.27: U1.P$H2
P0.28: U1.P$B11
P0.29: U1.P$A10
P0.30: U1.P$B9
P0.31: U1.P$A8
P1.01/1.6C: Q1.1 R_PWR_EPD.1
P1.01/2.4B: U1.P$Y23
P1.02/1.6C: C29.2 R7.1 SW_DN.2
P1.02/2.8C: U1.P$W24
P1.03: U1.P$V23
P1.04: U1.P$U24
P1.05: U1.P$T23
P1.06: U1.P$R24
P1.07: U1.P$P23
P1.09: U1.P$R1
P1.10: U1.P$A20
P1.11: U1.P$B19
P1.12: U1.P$B17
P1.13: U1.P$A16
P1.14: U1.P$B15
P1.15: U1.P$A14
PMIC_INT: IC1.A1 U1.P$T2
PREVGH: D5.1 EPD_C9.2 J1.21
PREVGL: D2.2 EPD_C11.2 J1.23
RESE: J1.3 Q3.2 R1_EP_DR.2
RESET: J2.6 TP_RESET.TP U1.P$AC13
RF: ANT1.1 C4.1 C22.1 L1.2
SCK/1.5B: J1.13
SCK/2.2D: U1.P$A12
SCL/1.4C: IC2.C1 U3.7
SCL/2.4C: IC1.B1 IC3.12 R4.1 R17.2 TP_SCL.TP U1.P$M2
SDA/1.4C: IC2.B2 U3.8
SDA/2.4C: IC1.C1 IC3.2 R2.1 R18.2 TP_SDA.TP U1.P$L1
SWDCLK: J2.4 TP_SWDCLK.TP U1.P$AA24
SWDIO: J2.2 TP_SWDIO.TP U1.P$AC24
SWO: TP_SWO.TP U1.P$AD22
VBAT/1.2A: C27.2 TP_VBAT.TP U3.2 U3.3
VBAT/2.5C: C37.2 IC1.C2
VBUS/1.5D: D3.5 J4.A4_B9 J4.A9_B4
VBUS/2.6D: C38.2 IC1.A2
VREG: C7.2 C24.2 IC1.B2 IC9.A1 IC9.A2 IC9.A3 TP_VREG.TP U$2.1

## Tracks (layer width: path | path; a pad name or v marks a point on that pad's centre or on a via)
3V3/1.7D  (via drill 0.35)
  Top 0.152: Q1.2 40.62,17.49 41.23,18.1 41.53,18.1 R_PWR_EPD.2 41.68,18.1 41.68,17.03 42.75,15.97 42.75,12.76 43.97,11.55 43.97,7.43 v40.62,4.08 | 7.55,8.8 8.46,8.8 8.92,9.26 10.75,9.26 13.49,6.52 13.49,6.36 13.03,5.91 R5.2 | 7.55,8.8 5.87,8.8 C34.2 | v6.18,5.14 6.18,5.91 IC2.C2 | 7.55,8.8 v7.55,8.5 | v14.4,6.36 15.01,6.97 24.77,6.97 24.92,6.82 24.92,6.21 24.77,6.06 24.62,6.06 R7.2 | v30.26,4.38 32.54,6.67 R8.2
  Bottom 0.152: 6.18,5.75 6.18,7.13 v7.55,8.5 | 6.18,5.75 v6.18,5.14 | v14.4,6.36 9.22,6.36 8.61,5.75 8.16,5.75 | 6.18,5.75 8.16,5.75 | 8.16,5.75 8.16,4.69 8.46,4.38 v30.26,4.38 36.35,4.38 36.66,4.08 v40.62,4.08
3V3/2.4A  (via drill 0.35)  (3 unrouted)
  Top 0.152: 5.87,28.77 5.87,28.46 IC9.E3 | 5.26,28.77 1.6,28.77 1.3,28.46 1.3,27.09 1.91,26.48 C33.1 2.06,26.33 2.06,26.02 2.21,25.87 2.82,25.87 3.13,26.18 3.59,26.18 C25.1 | 5.26,28.77 5.87,28.77 | 5.87,28.77 IC9.E2 | 9.68,28.16 9.68,28.61 9.38,28.92 | 9.68,28.16 9.68,28 9.53,27.85 9.38,27.85 R17.1 | 9.38,28.92 10.75,30.29 10.75,31.05 9.38,32.42 8.61,32.42 TP_3V3.TP | 9.38,28.92 R18.1 | v5.26,28.61 5.26,28.77 | 9.68,28.16 v10.14,27.7 | 21.11,14.75 21.42,14.75 U1.P$Y2 | 21.11,14.75 20.96,14.9 U1.P$W1 | 19.74,13.37 20.81,12.31 U$1.1 20.96,12.31 20.96,12.61 21.11,12.76 22.79,12.76 | 19.74,13.37 21.11,14.75 | 19.74,13.37 C8.1 | 24.46,13.37 24.46,13.53 U1.P$AD14 | 24.46,13.37 24.01,12.92 22.94,12.92 22.79,12.76 | 22.79,12.76 22.79,12.46 C6.1 | 24.46,13.37 24.77,13.07 26.29,13.07 27.05,12.31 27.51,12.31 C12.1 27.66,12.31 27.66,12.61 27.82,12.76 28.43,12.76 28.73,12.46 28.73,12.31 v29.19,11.85 | 28.43,8.65 27.97,8.65 27.66,8.34 C19.1 | 28.43,8.65 29.19,8.65 IC3.10 | 30.56,6.67 30.26,6.97 30.26,7.13 IC3.3 | 30.56,6.67 30.86,6.67 31.17,6.97 31.17,8.5 31.02,8.65 30.71,8.65 IC3.7 | v28.43,8.19 28.43,8.65 | 30.56,6.67 v30.26,6.36 | U1.P$AD23 27.05,13.53 28.43,13.53 28.73,13.83 C14.1 28.88,13.98 31.63,13.98 32.54,14.9 33.46,14.9 34.22,14.14 34.22,11.85 33.3,10.94 TP_3.3V.TP 33.15,10.78 v32.08,9.72 | v12.42,24.96 v11.51,25.87 | v16.39,9.87 v13.64,9.87
  Bottom 0.152: 7.85,28.61 9.22,28.61 v10.14,27.7 | 7.85,28.61 v5.26,28.61 | v30.26,6.36 29.8,6.82 | 29.8,6.82 v28.43,8.19 | 29.8,6.82 32.08,9.11 v32.08,9.72 | v29.19,11.85 29.19,8.95 v28.43,8.19 | 7.85,28.61 7.85,27.55 9.53,25.87 v11.51,25.87 | v12.42,24.96 12.42,24.65 15.17,21.91 15.17,13.98 13.64,12.46 v13.64,9.87 | v16.39,9.87 26.29,9.87 27.97,8.19 v28.43,8.19
DEC1  (1 unrouted)
DEC3  (via drill 0.35)
  Top 0.152: v28.58,21.91 28.58,21.45 28.12,20.99 28.12,19.47 27.66,19.01 27.36,19.01 27.05,18.71 U1.P$D23 | v18.98,16.27 19.59,16.88 C11.1
  Bottom 0.152: v28.58,21.91 28.12,21.91 25.38,19.16 22.18,19.16 19.28,16.27 v18.98,16.27
DEC4_6  (via drill 0.35)  (2 unrouted)
  Top 0.152: U1.P$B5 22.18,19.47 22.18,19.62 21.26,20.54 21.11,20.54 20.96,20.69 20.96,20.99 C15.1 20.96,21.15 20.96,21.45 21.11,21.6 21.57,21.6 21.72,21.45 21.72,21.3 22.02,20.99 C16.1 | v18.37,12.92 19.43,11.85 19.59,11.85 C10.1 | v29.19,22.67 29.19,21.15 30.86,19.47 30.86,18.86 30.56,18.56 28.88,18.56 L3.2
  Bottom 0.152: v18.37,12.92 18.37,16.57 18.67,16.88 19.43,16.88 24.16,21.6 27.36,21.6 28.43,22.67 v29.19,22.67
DN
  Top 0.152: 23.4,28 23.4,28.46 J4.A7 | 23.4,28 23.7,27.7 24.16,27.7 24.31,27.85 24.31,28.46 J4.B7 | 23.4,28 22.02,26.63 20.96,26.63 D3.1
DP  (via drill 0.35)
  Top 0.152: 23.55,29.53 23.09,29.53 22.94,29.38 22.94,28.61 J4.B6 | 23.55,29.53 23.85,29.22 23.85,28.61 J4.A6 | v25.99,27.4 25.99,26.02 24.16,24.19 22.63,24.19 22.18,24.65 20.96,24.65 D3.3 | 23.55,29.53 v23.55,29.83
  Bottom 0.152: v23.55,29.83 v25.99,27.4
EPD_3V3  (via drill 0.35)
  Top 0.152: v41.07,21.15 39.55,19.62 Q1.3 | v37.72,29.07 36.66,30.14 L5.2 | J1.15 11.51,15.51 J1.16 | 13.49,24.65 13.49,25.41 12.27,26.63 12.27,29.99 14.4,32.12 31.78,32.12 33.15,33.49 35.13,33.49 35.74,32.88 C1-EP-DR.1 35.89,32.73 v36.66,31.97 | J1.15 10.75,15.97 v9.68,17.03 | v12.12,24.04 12.88,24.04 13.49,24.65 | J1.15 | 13.49,24.65 EPD_C5.2
  Bottom 0.152: v41.07,21.15 41.38,21.15 43.51,23.28 43.51,23.89 41.23,26.18 39.86,26.18 38.48,27.55 38.48,28.31 v37.72,29.07 37.72,30.9 v36.66,31.97 | v9.68,17.03 9.68,17.49 8.77,18.4 8.77,20.69 v12.12,24.04
GDR  (via drill 0.35)
  Top 0.152: R2_EP_DR.2 31.02,24.35 30.1,25.26 30.1,26.63 30.86,27.4 42.6,27.4 43.97,26.02 43.97,22.21 43.21,21.45 Q3.1 43.21,21.3 v42.45,20.54 | v9.68,18.86 9.68,20.99 11.05,22.37 11.51,22.37 J1.2 | v8.77,4.99 v7.24,6.52
  Bottom 0.152: v9.68,18.86 9.68,18.4 11.05,17.03 11.05,8.65 8.46,6.06 7.7,6.06 v7.24,6.52 | v8.77,4.99 36.5,4.99 36.66,4.84 41.38,4.84 43.97,7.43 43.97,19.01 v42.45,20.54
GND  (via drill 0.35)  (4 unrouted)
  Top 0.152: R1_USB.1 18.98,27.55 18.98,28.77 19.28,29.07 J4.SH4 | SJ1.1 40.31,32.73 40.31,33.03 39.7,33.64 35.44,33.64 35.28,33.8 28.43,33.8 27.97,33.34 J4.SH1 27.82,33.34 19.43,33.34 J4.SH2 | 13.95,12.76 15.47,12.76 15.78,12.46 15.78,11.85 14.71,10.78 13.95,10.78 EPD_C8.1 | 13.95,12.76 13.95,13.53 | 13.95,12.76 EPD_C9.1 | 13.95,13.53 14.4,13.98 14.4,14.59 13.95,15.05 EPD_C6.1 13.95,15.2 14.25,15.2 14.4,15.35 14.4,16.12 14.1,16.42 | 13.95,13.53 EPD_C7.1 | 13.64,17.79 13.34,17.49 13.34,16.88 13.64,16.57 | 13.64,17.79 13.8,17.95 EPD_C1.1 | 13.64,16.57 13.8,16.57 EPD_C2.1 | 13.64,16.57 12.12,15.05 11.66,15.05 J1.17 | 13.64,16.57 EPD_C2.1 | 13.64,17.79 11.97,19.47 11.66,19.47 J1.8 | 14.1,16.42 13.95,16.57 EPD_C2.1 | C27.1 13.03,27.85 12.88,27.85 12.58,28.16 12.58,28.46 13.8,29.68 14.25,29.68 U3.1 14.4,29.68 14.86,29.68 15.47,29.07 U3.9 | 14.86,28.31 14.4,28.31 U3.4 | 15.32,28.77 15.47,28.92 U3.9 | 15.32,28.77 14.86,28.31 | 15.32,28.77 16.23,28.77 U3.6 | 15.32,28.77 U3.9 | 16.54,26.78 15.01,28.31 14.86,28.31 | 16.54,26.78 16.84,26.48 TP_BAT_GND.TP 16.54,26.78 | 16.54,26.78 14.56,24.8 | 14.56,24.8 13.8,24.04 13.64,24.04 EPD_C5.1 13.49,24.04 13.49,23.59 13.03,23.13 13.03,22.82 13.49,22.37 EPD_C10.1 13.64,22.37 14.1,21.91 14.1,21.3 13.8,20.99 EPD_C12.1 13.64,20.99 13.19,20.54 13.19,19.93 13.49,19.62 13.64,19.62 EPD_C11.1 13.8,19.47 14.71,19.47 15.47,18.71 15.47,17.79 14.1,16.42 | v31.02,22.98 31.02,23.59 R2_EP_DR.1 | 27.82,11.85 27.05,11.85 26.75,12.16 26.45,12.16 C4.2 26.29,12.31 26.29,12.61 26.14,12.76 25.53,12.76 25.23,12.46 24.77,12.46 C2.2 24.77,12.31 v24.77,11.55 | 27.82,11.85 28.12,12.16 C12.2
  Top 0.152: 27.82,11.85 28.12,11.55 28.12,11.09 C13.2 | 26.14,18.4 26.29,18.25 26.9,18.25 U1.P$F23 | 22.48,16.12 22.48,15.05 U1.P$87 | 22.48,16.12 U1.P$83 22.48,16.27 22.48,17.18 U1.P$79 | 22.48,16.12 U1.P$74 | 23.7,16.12 23.7,15.05 U1.P$88 | 23.7,16.12 U1.P$84 | 23.7,16.12 U1.P$74 | U1.P$80 23.7,17.18 23.7,16.57 U1.P$74 | 24.92,16.12 24.92,15.05 U1.P$89 | 24.92,16.12 U1.P$85 | 24.92,16.12 U1.P$74 | U1.P$81 24.92,17.34 U1.P$74 | 26.14,16.12 26.14,15.05 U1.P$90 | 26.14,16.12 U1.P$86 | 26.14,16.12 U1.P$74 | 25.53,17.79 25.99,17.34 U1.P$82 | 23.55,18.56 22.48,18.56 U1.P$75 | 23.55,18.56 U1.P$76 | 23.55,18.56 U1.P$74 | 25.53,17.79 24.92,18.4 U1.P$77 | 25.53,17.79 U1.P$74 | 26.14,18.4 U1.P$78 | 26.14,18.4 U1.P$74 | 21.57,12.16 22.18,12.16 22.48,11.85 22.79,11.85 23.24,12.31 C6.2 | 21.57,12.16 21.42,12.16 U$1.2 | 21.57,12.16 21.11,11.7 20.81,11.7 20.2,12.31 19.74,12.31 C10.2 19.59,12.46 19.59,12.76 19.13,13.22 19.13,13.83 19.28,13.98 19.59,13.98 C8.2 19.59,14.14 19.59,14.59 17.3,16.88 17.3,17.18 X1.4 17.3,17.34 17.76,17.79 17.76,17.95 18.52,18.71 | 18.52,18.71 19.59,17.64 C11.2 | 18.52,18.71 X1.2 18.52,18.86 18.52,20.23 18.82,20.54 | 23.55,22.98 23.24,23.28 23.09,23.28 C37.1 | 23.55,22.98 23.55,22.67 23.09,22.21 R9.1 22.94,22.21 21.26,22.21 20.35,21.3 20.04,21.3 U$2.2 19.89,21.15 19.28,20.54 C22.2 19.13,20.54 18.82,20.54 | C21.2 24.01,20.99 24.01,21.15 24.31,21.45 24.92,21.45 25.07,21.3 25.07,20.99 C1.2 25.23,20.99 25.68,21.45 26.29,21.45 26.6,21.15 | 27.97,22.98 27.66,23.28 | 27.97,21.45 27.97,21.3 27.82,21.15 C5.2 | 27.97,21.45 27.97,22.98 | 26.6,21.15 26.9,21.45 27.97,21.45 | 26.6,21.15 26.45,20.99 C20.2
  Top 0.152: C1-EP-DR.2 34.52,32.73 34.07,32.27 32.69,32.27 R_TYPE_SEL.1 32.54,32.27 30.86,30.59 30.86,29.53 D4.1 30.71,29.38 29.95,28.61 28.43,28.61 | 28.43,28.61 28.43,27.55 R2_USB.2 28.58,27.4 27.66,26.48 27.66,24.35 | 28.43,28.61 27.97,29.07 J4.SH3 | 27.66,24.35 27.66,23.28 | 27.66,23.28 IC1.D2 | 23.55,22.98 24.16,22.98 25.53,24.35 27.66,24.35 | 27.97,22.98 v28.27,23.28 | 18.82,20.54 14.56,24.8 | C43.2 28.58,1.94 27.82,2.71 27.66,2.71 C42.2 27.66,2.86 27.97,3.16 27.97,4.84 R3.1 27.97,4.99 26.29,4.99 25.23,6.06 | 29.95,8.8 30.1,8.8 IC3.8 30.26,8.8 30.26,9.11 30.41,9.26 30.86,9.26 32.08,8.04 32.08,7.89 32.85,7.13 34.83,7.13 | 29.95,8.8 29.8,8.8 IC3.9 | 29.95,8.8 29.49,9.26 29.04,9.26 28.73,8.95 27.66,8.95 C19.2 27.51,8.8 26.9,8.8 25.23,7.13 | 24.31,5.14 24.31,4.84 SW_DN.1 24.31,5.14 | 24.31,5.14 24.31,5.3 23.85,5.75 23.7,5.75 23.24,6.21 C29.1 | 25.23,6.06 25.23,7.13 | 24.31,5.14 25.23,6.06 | 29.34,15.35 28.88,14.9 28.88,14.59 C14.2 | 29.34,15.81 29.34,15.35 | 29.34,15.81 29.19,15.97 28.88,15.97 C3.2 | 29.34,15.35 33.46,15.35 34.83,13.98 34.83,7.13 | 34.83,7.13 34.83,5.75 35.44,5.14 35.44,4.84 SW_ENT.1 35.59,4.69 36.05,4.69 37.11,3.62 38.18,3.62 TP_GND.TP | 6.79,29.22 6.63,29.07 6.63,28.77 IC9.C2 | 6.79,29.22 IC9.B1 | 6.79,29.22 IC9.C1 | 6.33,26.18 5.87,25.72 5.41,25.72 4.96,26.18 C24.1 | 6.33,26.18 6.48,26.33 C7.1 | IC9.B1 7.09,29.38 7.4,29.68 7.55,29.68 8,29.22 8,28.31 7.85,28.16 7.85,26.63 7.24,26.02 | 7.24,26.02 7.09,25.87 6.63,25.87 6.33,26.18 | IC9.B1 | 7.24,26.02 8.77,24.5 8.77,23.89 J1.MP1 8.77,23.74 8.77,22.06 8.46,21.76 8.46,11.09 8.77,10.78 J1.MP2 | 5.41,8.8 5.41,9.11 5.72,9.41 7.55,9.41 8.77,10.63 J1.MP2
  Top 0.152: 5.41,3.47 4.35,4.54 4.19,4.54 3.59,5.14 3.59,6.97 5.26,8.65 | 5.41,8.8 5.26,8.65 | 5.41,8.8 C34.1 | 5.26,8.65 6.02,7.89 8,7.89 9.07,8.95 9.99,8.95 11.97,6.97 11.97,6.21 C30.1 | 5.41,3.47 5.41,3.32 5.72,3.01 6.02,3.01 6.33,3.32 6.33,3.62 4.8,5.14 4.5,5.14 4.19,5.45 4.19,6.06 4.5,6.36 5.57,6.36 IC2.B1 | 5.41,3.47 C32.1 | 13.8,6.67 13.8,6.06 13.34,5.6 13.34,4.84 SW_UP.1 | 13.8,6.67 9.83,10.63 8.92,10.63 J1.MP2 | 25.23,7.13 25.07,7.13 24.92,7.28 14.4,7.28 13.8,6.67 | 29.34,15.81 v29.65,16.12
  Bottom 0.152: J4.SH4 19.28,29.22 19.28,30.44 17.3,32.42 17.3,33.03 17.61,33.34 J4.SH2 | v31.02,22.98 30.56,22.98 30.26,22.67 | 30.26,22.67 26.14,18.56 U1.P$78 | v24.77,11.55 24.77,14.9 U1.P$89 | 30.26,22.67 29.65,23.28 v28.27,23.28 | J4.SH1 27.82,33.19 27.82,32.27 27.36,31.81 27.36,30.9 27.97,30.29 27.97,29.22 J4.SH3 | v29.65,16.12 26.14,16.12 U1.P$86
  pour Top: -3.29,6.15 4.1,-1.24 5.5,-1.24 5.53,-1.25 6.54,-2.27 43.24,-2.27 43.24,-2.25 43.25,-2.22 47.87,2.4 47.6,2.67 47.59,2.7 47.59,32.42 44.71,35.29 31.14,35.29 31.11,35.31 31.09,35.33 31.08,35.35 31.08,35.89 29.86,37.11 8.68,37.11 7.5,35.94 7.47,35.93 3.78,35.93 1.51,33.66 1.5,33.65 1.5,33.65 1.5,33.64 1.48,33.64 -1.23,32.47 -1.23,31.32 -1.24,31.29 -2.97,29.57 -2.97,15.67 -2.98,15.64 -3.29,15.33
  pour Bottom: -3.13,2.98 3.86,-4.01 7,-4.01 7.03,-4.02 7.73,-4.72 43.6,-4.72 50.35,2.03 50.35,31.94 44.07,38.22 21.31,38.22 19.74,36.65 19.71,36.64 3.19,36.64 3.19,36.64 3.19,36.63 3.19,36.62 3.19,36.61 3.19,36.61 3.18,36.6 3.18,36.59 3.17,36.59 3.17,36.58 3.16,36.58 3.16,36.57 3.15,36.57 3.15,36.56 3.14,36.56 3.13,36.56 3.12,36.56 3.12,36.56 3.11,36.56 3.1,36.56 3.09,36.56 2.63,36.64 2.62,36.64 2.62,36.64 2.61,36.64 2.61,36.65 2.6,36.65 -2.73,31.31 -2.73,28.76 -2.19,28.22 -2.18,28.19 -2.18,12.98 -2.19,12.95 -3.13,12.01
IMU_INT1  (1 unrouted)
IMU_INT2  (1 unrouted)
LX1  (via drill 0.35)
  Top 0.152: 7.09,28.46 7.09,28.77 IC9.B2 | 7.09,28.46 7.09,28 v6.48,27.4 | v4.5,29.38 3.28,29.38 2.82,29.83 L7.1 | 7.09,28.46 IC9.B3
  Bottom 0.152: v6.48,27.4 5.87,26.78 5.26,26.78 4.5,27.55 v4.5,29.38
LX2  (1 unrouted)
  Top 0.152: IC9.D3 6.33,28.46 6.33,28.31 6.02,28 2.98,28 2.82,27.85 L7.2
N$1  (via drill 0.35)
  Top 0.152: v27.21,9.87 25.99,8.65 23.24,8.65 21.72,10.17 21.72,10.63 L2.2 | v30.86,15.97 29.49,17.34 28.88,17.34 L3.1
  Bottom 0.152: v27.21,9.87 27.21,10.63 28.58,12 28.58,13.68 v30.86,15.97
N$2  (1 unrouted)
N$3
  Top 0.152: IC1.D1 27.51,22.82 27.51,22.67 26.75,21.91 25.07,21.91 24.62,22.37 23.85,22.37 23.09,21.6 R9.2
N$4
  Top 0.152: 22.48,20.38 22.48,20.84 C16.2 | 22.48,20.38 22.48,19.77 22.79,19.47 U1.P$B7 | 22.48,20.38 21.87,20.38 21.42,20.84 21.42,20.99 C15.2
N$5  (1 unrouted)
N$6  (1 unrouted)
N$7  (1 unrouted)
N$8  (1 unrouted)
  Top 0.152: U1.P$H23 27.05,17.79 27.36,18.1 27.66,18.1 28.12,18.56 28.12,19.01 28.73,19.62 L1.1
N$9  (1 unrouted)
  Top 0.152: U1.P$B24 27.51,19.47 27.51,19.93 27.05,20.38 24.92,20.38 24.62,20.69 24.62,20.84 C1.1
N$10  (1 unrouted)
N$11  (1 unrouted)
N$12  (1 unrouted)
  Top 0.152: C2.1 24.16,12.31 23.85,12.31 23.09,11.55 21.42,11.55 21.26,11.39 18.98,11.39 16.54,13.83 16.54,18.1 17.15,18.71 X1.3
N$13
  Top 0.152: R3.2 28.73,4.99 28.73,6.67 29.19,7.13 IC3.1
N$15
  Top 0.152: EPD_C2.2 13.95,17.18 14.4,17.18 15.17,17.95 15.17,18.56 14.71,19.01 13.49,19.01 12.12,20.38 12.12,21.3 11.97,21.45 11.66,21.45 J1.4
N$16
  Top 0.152: IC9.D1 6.33,29.22 6.33,29.38 6.94,29.99 8.61,29.99 9.22,29.38 R4.2
N$17
  Top 0.152: C25.2 4.04,26.33 4.04,26.63 3.89,26.78 2.82,26.78 2.52,26.48 C33.2
N$18  (via drill 0.35)
  Top 0.152: v14.56,18.25 14.25,18.56 13.95,18.56 EPD_C1.2 | v10.6,20.38 11.21,20.99 11.51,20.99 J1.5
  Bottom 0.152: v14.56,18.25 12.73,18.25 v10.6,20.38
N$19
  Top 0.152: IC9.E1 5.87,29.22 5.87,29.38 7.09,30.59 8.46,30.59 8.77,30.9 R2.2
N$20
  Top 0.152: EPD_C12.2 13.64,21.6 12.12,23.13 12.12,23.28 11.97,23.43 11.05,23.43 9.07,21.45 9.07,12.61 10.14,11.55 11.51,11.55 J1.24
N$21
  Top 0.152: 32.54,31.36 32.54,31.66 R_TYPE_SEL.2 | 32.54,31.36 32.54,29.83 29.49,26.78 29.49,24.04 29.8,23.74 29.95,23.74 R1_EP_DR.1 | 32.54,31.36 36.96,31.36 38.18,32.58 38.79,32.58 SJ1.2
N$22  (via drill 0.35)
  Top 0.152: C2-EP-DR.2 32.54,21.45 35.28,21.45 36.5,22.67 36.5,25.41 L5.1 36.66,25.57 37.88,26.78 v40.16,26.78 | v41.23,28 42.6,29.38 D5.2
  Bottom 0.152: v41.23,28 40.16,26.94 v40.16,26.78
N$23
  Top 0.152: EPD_C10.2 13.64,22.98 13.95,22.98 16.23,20.69 16.23,10.94 17,10.17 17,9.56 16.69,9.26 13.34,9.26 12.42,10.17 12.42,12 11.97,12.46 11.66,12.46 J1.22
N$24
  Top 0.152: Q3.3 40.92,22.06 38.18,22.06 D2.1 38.03,22.06 36.35,22.06 35.13,20.84 32.08,20.84 31.78,21.15 31.78,22.21 32.39,22.82 C2-EP-DR.1 32.39,22.98 32.39,24.35 30.86,25.87 D4.2
N$25
  Top 0.152: EPD_C7.2 13.8,14.14 12.12,14.14 11.97,13.98 11.66,13.98 J1.19
N$26
  Top 0.152: EPD_C8.2 13.8,11.24 13.8,11.55 11.97,13.37 11.66,13.37 J1.20
N$27
  Top 0.152: EPD_C6.2 13.8,15.51 13.03,15.51 11.97,14.44 11.66,14.44 J1.18
N$29
  Top 0.152: C32.2 5.87,3.47 5.87,3.62 4.65,4.84 4.35,4.84 3.89,5.3 3.89,6.21 4.96,7.28 5.72,7.28 6.02,6.97 IC2.A2
N$31
  Top 0.152: C42.1 27.05,2.71 27.05,2.25 27.36,1.94 C43.1
N$35
  Top 0.152: R2_USB.1 27.82,27.4 24.31,23.89 20.5,23.89 20.04,24.35 20.04,27.09 20.65,27.7 21.57,27.7 21.87,28 21.87,28.46 J4.B5
N$40
  Top 0.152: R1_USB.2 19.43,27.4 19.43,27.24 19.13,26.94 18.67,26.94 18.37,27.24 18.37,29.99 19.59,31.2 23.09,31.2 24.77,29.53 24.77,28.61 J4.A5
OUT+
  Top 0.152: IC2.A3 6.63,6.97 7.24,7.58 9.38,7.58 TP_OP.TP
OUT-
  Top 0.152: IC2.C3 6.63,5.75 7.7,4.69 7.7,3.16 TP_ON.TP
P0.00/XL1  (via drill 0.35)
  Top 0.152: U1.P$D2 21.42,18.71 21.42,19.62 21.11,19.93 20.5,19.93 v20.35,19.77 19.74,19.16 C17.2 | v24.46,9.26 23.4,10.33 X2.1
  Bottom 0.152: v20.35,19.77 18.37,17.79 18.21,17.79 15.47,15.05 15.47,13.83 14.25,12.61 14.25,8.04 16.08,6.21 27.05,6.21 27.66,6.82 27.66,7.43 25.84,9.26 v24.46,9.26
P0.01/XL2  (via drill 0.35)
  Top 0.152: v20.35,16.27 20.35,17.95 20.81,18.4 21.11,18.4 21.26,18.25 21.42,18.25 U1.P$F2 | v24.77,10.63 25.68,10.63 25.84,10.48 X2.2 25.99,10.48 28.73,10.48 29.8,11.55 29.8,12.76 29.65,12.92 29.34,12.92 C18.2
  Bottom 0.152: v20.35,16.27 20.35,15.05 v24.77,10.63
P0.13/1.5D
  Top 0.152: 11.36,6.06 10.44,5.14 10.44,4.84 SW_UP.2 | 11.36,6.06 11.51,6.21 C30.2 | 11.36,6.06 11.66,5.75 12.12,5.75 12.73,6.36 12.88,6.36 R5.1
P0.14/1.5D
  Top 0.152: 32.69,6.06 33,6.36 33.91,6.36 C31.2 | 32.69,6.06 32.69,4.84 SW_ENT.2 | 32.69,6.06 R8.1
P1.01/1.6C
  Top 0.152: R_PWR_EPD.1 41.53,18.71 39.86,18.71 38.64,17.49 Q1.1
P1.02/1.6C
  Top 0.152: 22.79,6.21 22.33,5.75 22.18,5.75 21.72,5.3 21.72,4.84 SW_DN.2 | 22.79,6.21 22.79,6.36 23.09,6.67 23.4,6.67 23.55,6.52 24.46,6.52 R7.1 | 22.79,6.21 C29.2
PMIC_INT  (1 unrouted)
PREVGH  (via drill 0.35)
  Top 0.152: v15.17,12.16 13.95,12.16 EPD_C9.2 | v27.51,5.75 v26.14,7.13 | v41.68,19.93 41.68,21.45 42.29,22.06 42.29,25.57 42.6,25.87 D5.1 | v10.44,12.61 10.75,12.92 11.51,12.92 J1.21 | v8.16,6.67 8.61,6.67 v9.53,5.75
  Bottom 0.152: v15.17,12.16 15.17,9.26 14.86,8.95 14.86,8.34 16.08,7.13 v26.14,7.13 | v41.68,19.93 41.38,19.93 34.83,13.37 34.83,10.02 30.56,5.75 v27.51,5.75 v9.53,5.75 | v10.44,12.61 10.44,8.95 v8.16,6.67
PREVGL  (via drill 0.35)
  Top 0.152: v14.4,20.69 13.8,20.08 EPD_C11.2 | v10.29,13.53 9.83,13.07 9.83,12.31 10.14,12 11.51,12 J1.23 11.66,11.85 11.97,11.85 12.12,11.7 12.12,11.24 11.81,10.94 10.29,10.94 8.77,12.46 8.77,21.6 10.75,23.59 10.75,28.92 14.56,32.73 v17.91,32.73 | v33,23.89 33.3,23.59 33.3,23.13 34.22,22.21 34.52,22.21 D2.2
  Bottom 0.152: v14.4,20.69 11.21,20.69 10.9,20.99 10.29,20.99 9.07,19.77 9.07,18.56 10.29,17.34 v10.29,13.53 | v33,23.89 31.47,23.89 28.58,26.78 25.68,26.78 20.35,32.12 18.52,32.12 v17.91,32.73
RESE  (via drill 0.35)
  Top 0.152: v31.02,22.06 30.41,22.67 30.41,23.28 30.56,23.43 30.56,23.74 30.1,24.19 R1_EP_DR.2 | v42.9,23.59 42.9,22.98 43.06,22.82 Q3.2 | v10.6,18.86 9.99,19.47 9.99,20.84 11.05,21.91 11.51,21.91 J1.3 | v15.47,8.65 v13.64,8.65
  Bottom 0.152: v31.02,22.06 32.24,22.06 32.54,22.37 | 32.54,22.37 33.91,23.74 42.75,23.74 v42.9,23.59 | v10.6,18.86 10.6,17.95 13.03,15.51 13.03,9.26 v13.64,8.65 | v15.47,8.65 15.47,11.55 18.06,14.14 18.06,16.73 18.52,17.18 19.28,17.18 24.01,21.91 25.99,21.91 27.97,23.89 31.02,23.89 32.54,22.37
RESET  (2 unrouted)
RF  (via drill 0.35)  (1 unrouted)
  Top 0.152: v26.9,11.24 26.6,11.55 26.29,11.55 25.84,12 25.84,12.16 C4.1 | v30.26,19.16 28.88,20.54 L1.2 | v37.88,28 39.09,28 41.38,30.29 43.21,30.29 44.28,29.22 44.28,21.3 43.82,20.84 43.67,20.84 42.75,19.93 42.75,18.4 43.82,17.34 43.82,16.27 ANT1.1 | v34.22,23.13 v34.22,24.35
  Bottom 0.152: v26.9,11.24 26.9,12.46 30.26,15.81 v30.26,19.16 v34.22,23.13 | v34.22,24.35 v37.88,28
SCL/1.4C  (via drill 0.35)
  Top 0.152: v4.8,5.75 5.57,5.75 IC2.C1 | v17,30.44 17,29.53 16.84,29.38 16.39,29.38 U3.7
  Bottom 0.152: v4.8,5.75 4.8,6.67 8.46,10.33 8.46,21.91 v17,30.44
SCL/2.4C  (via drill 0.35)  (1 unrouted)
  Top 0.152: v25.38,22.52 26.6,22.52 26.75,22.67 26.75,22.82 IC1.B1 | v12.12,32.12 11.51,32.12 10.75,32.88 TP_SCL.TP | v9.99,26.48 9.38,27.09 R17.2 | v10.14,30.75 9.38,29.99 R4.1 | v27.05,7.13 28.43,7.13 29.04,7.73 IC3.12
  Bottom 0.152: v25.38,22.52 21.57,22.52 20.96,21.91 | 20.96,21.91 20.35,21.91 17.61,24.65 17.61,30.75 16.23,32.12 15.32,32.12 | 15.32,32.12 v12.12,32.12 10.75,30.75 v10.14,30.75 | v9.99,26.48 10.6,26.48 15.32,31.2 15.32,32.12 | v27.05,7.13 26.45,6.52 16.23,6.52 14.56,8.19 14.56,12.46 17.76,15.66 17.76,16.88 18.37,17.49 18.98,17.49 20.96,19.47 20.96,21.91
SDA/1.4C  (1 unrouted)
SDA/2.4C  (via drill 0.35)  (2 unrouted)
  Top 0.152: 7.4,31.51 6.18,32.73 TP_SDA.TP | 7.4,31.51 7.85,31.05 8.16,31.05 R2.1 | v8.46,27.85 8.92,28.31 9.22,28.31 R18.2 | 7.4,31.51 v7.4,31.36 | v29.95,8.04 29.8,7.89 29.8,7.28 IC3.2 | v14.71,31.51 v27.97,31.51
  Bottom 0.152: v8.46,27.85 9.07,27.85 9.83,27.09 10.44,27.09 10.75,27.4 10.75,28 | v7.4,31.36 10.75,28 | v29.95,8.04 29.95,9.11 43.82,22.98 43.82,26.33 37.57,32.58 29.04,32.58 v27.97,31.51 | v14.71,31.51 14.25,31.51 10.75,28
SWDCLK  (1 unrouted)
  Top 0.152: U1.P$AA24 27.51,14.44 28.12,15.05 28.12,17.79 28.27,17.95 36.66,17.95 38.94,15.66 TP_SWDCLK.TP
SWDIO  (2 unrouted)
SWO
  Top 0.152: U1.P$AD22 26.45,13.53 26.9,13.07 28.58,13.07 29.04,13.53 32.85,13.53 TP_SWO.TP
VBAT/1.2A
  Top 0.152: 13.49,28.31 13.03,28.31 C27.2 | 13.49,28.31 13.95,28.77 14.25,28.77 U3.3 14.4,28.77 14.4,29.22 U3.2 | 13.49,28.31 13.49,27.24 14.25,26.48 TP_VBAT.TP
VBAT/2.5C  (1 unrouted)
VBUS/1.5D  (2 unrouted)
VBUS/2.6D  (1 unrouted)
VREG  (via drill 0.35)
  Top 0.152: v25.84,23.74 26.45,23.74 26.75,23.43 26.75,23.28 IC1.B2 | v20.65,22.52 20.04,21.91 U$2.1 | 7.55,28.77 7.55,28.46 | 7.55,28.77 7.55,29.22 IC9.A1 | 7.55,28.77 IC9.A2 | 6.79,26.63 6.63,26.78 6.18,26.78 | 6.79,26.63 6.94,26.48 6.94,26.33 C7.2 | 6.18,26.78 5.72,26.33 C24.2 | 7.55,28.46 7.55,27.4 6.79,26.63 | 7.55,28.46 IC9.A3 | v5.57,27.4 6.18,26.78 | v4.65,30.29 4.65,30.75 3.89,31.51 TP_VREG.TP
  Bottom 0.152: 21.87,23.74 v25.84,23.74 | v20.65,22.52 21.87,23.74 | v5.57,27.4 6.18,28 6.79,28 7.09,27.7 7.09,27.09 6.48,26.48 5.11,26.48 3.89,27.7 3.89,29.68 4.5,30.29 v4.65,30.29 7.09,32.73 16.08,32.73 17.91,30.9 17.91,28.92 21.87,24.96 21.87,23.74